# EAGLE board Micro_Bit_Breakout (EAGLE 7.3.0)
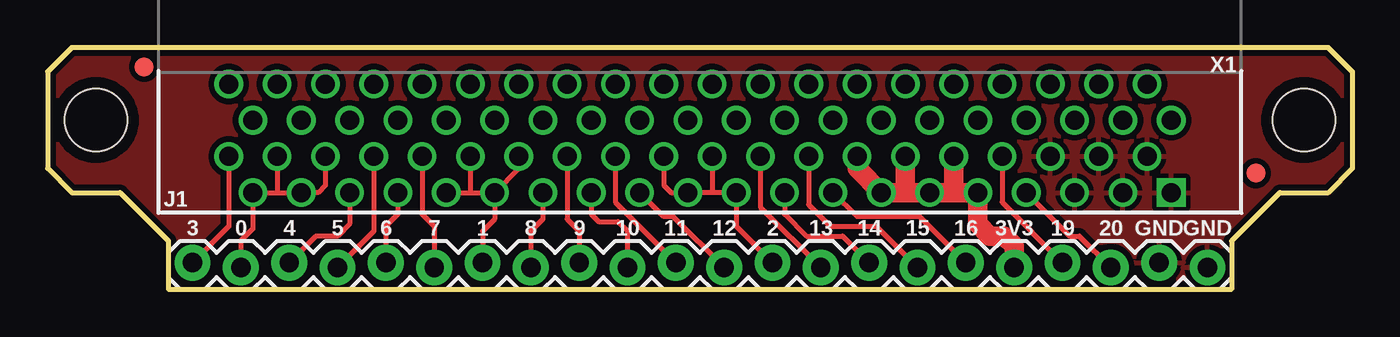
[diagram p0: board, top side]
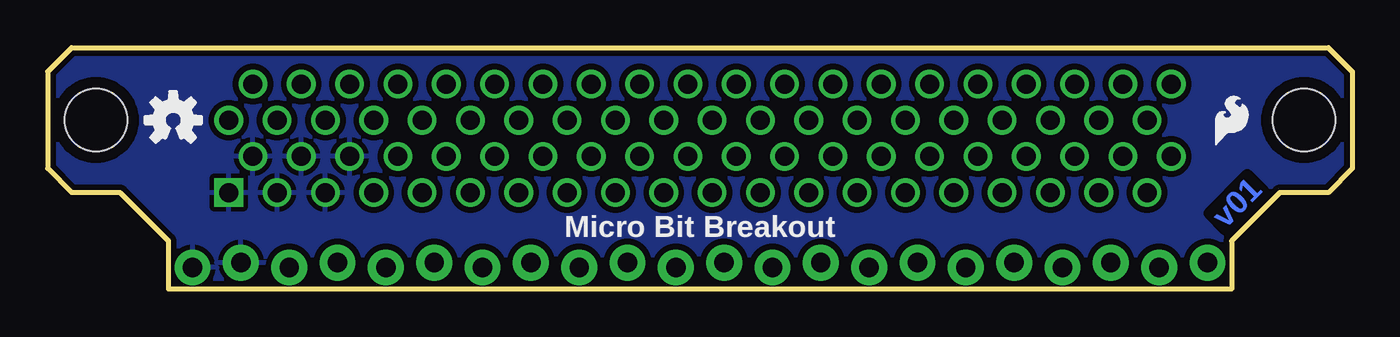
[diagram p1: board, bottom side, seen from below]

Size 68.58 x 12.7 mm. Coordinates in mm from the lower left corner, seen from the top.
Outline: 6.35,0 62.23,0 62.23,2.54 64.77,5.08 67.31,5.08 68.58,6.35 68.58,11.43 67.31,12.7 1.27,12.7 0,11.43 0,6.35 1.27,5.08 3.81,5.08 6.35,2.54 6.35,0
Copper layers (1*16): Top 0.035mm / dielectric 1.5mm / Bottom 0.035mm
Design rules "SparkFun-2-layer-STANDARD": minimum track width 10mil, minimum drill 20mil, track to track 10mil, track to pad 8mil, pad to pad 8mil, via to via 10mil, smd to smd 8mil, copper to edge 8mil, drill to drill 8mil, minimum pad ring 10mil, minimum via ring 10mil, stop-mask expansion 4mil, vias tented up to drill 25mil, thermal gap 10mil

## Footprints (pad centres in the part's own frame; a part is rotated, then mirrored left to right if it is on the bottom)
FIDUCIAL-1X2 = smd 1 x 1: 1 0,0
STAND-OFF = hole 3.302: 0,0
1X22_LOCK = drill 1.016 pad 1.88: 1 0,0.127; 2 2.54,-0.127; 3 5.08,0.127; 4 7.62,-0.127; 5 10.16,0.127; 6 12.7,-0.127; 7 15.24,0.127; 8 17.78,-0.127; 9 20.32,0.127; 10 22.86,-0.127; 11 25.4,0.127; 12 27.94,-0.127; 13 30.48,0.127; 14 33.02,-0.127; 15 35.56,0.127; 16 38.1,-0.127; 17 40.64,0.127; 18 43.18,-0.127; 19 45.72,0.127; 20 48.26,-0.127; 21 50.8,0.127; 22 53.34,-0.127
VEC-127-080-R = drill 1 square: A1 -24.765,0 | drill 1: A2 -23.495,-1.9; A3 -22.225,0; A4 -20.955,-1.9; A5 -19.685,0; A6 -18.415,-1.9; A7 -17.145,0; A8 -15.875,-1.9; A9 -14.605,0; A10 -13.335,-1.9; A11 -12.065,0; A12 -10.795,-1.9; A13 -9.525,0; A14 -8.255,-1.9; A15 -6.985,0; A16 -5.715,-1.9; A17 -4.445,0; A18 -3.175,-1.9; A19 -1.905,0; A20 -0.635,-1.9; A21 0.635,0; A22 1.905,-1.9; A23 3.175,0; A24 4.445,-1.9; A25 5.715,0; A26 6.985,-1.9; A27 8.255,0; A28 9.525,-1.9; A29 10.795,0; A30 12.065,-1.9; A31 13.335,0; A32 14.605,-1.9; A33 15.875,0; A34 17.145,-1.9; A35 18.415,0; A36 19.685,-1.9; A37 20.955,0; A38 22.225,-1.9; A39 23.495,0; A40 24.765,-1.9; B1 -24.765,-3.8; B2 -23.495,-5.7; B3 -22.225,-3.8; B4 -20.955,-5.7; B5 -19.685,-3.8; B6 -18.415,-5.7; B7 -17.145,-3.8; B8 -15.875,-5.7; B9 -14.605,-3.8; B10 -13.335,-5.7; B11 -12.065,-3.8; B12 -10.795,-5.7; B13 -9.525,-3.8; B14 -8.255,-5.7; B15 -6.985,-3.8; B16 -5.715,-5.7; B17 -4.445,-3.8; B18 -3.175,-5.7; B19 -1.905,-3.8; B20 -0.635,-5.7; B21 0.635,-3.8; B22 1.905,-5.7; B23 3.175,-3.8; B24 4.445,-5.7; B25 5.715,-3.8; B26 6.985,-5.7; B27 8.255,-3.8; B28 9.525,-5.7; B29 10.795,-3.8; B30 12.065,-5.7; B31 13.335,-3.8; B32 14.605,-5.7; B33 15.875,-3.8; B34 17.145,-5.7; B35 18.415,-3.8; B36 19.685,-5.7; B37 20.955,-3.8; B38 22.225,-5.7; B39 23.495,-3.8; B40 24.765,-5.7

## Placement (x,y rotation side)
FD1  FIDUCIAL1X2  [FIDUCIAL-1X2]  5.08,11.68 0 top
FD2  FIDUCIAL1X2  [FIDUCIAL-1X2]  63.5,6.1 0 top
FRAME1  FRAME-LETTER  [CREATIVE_COMMONS]  10.16,-11.43 0 top  (outside the outline)
H1  STAND-OFF  [STAND-OFF]  2.54,8.89 0 top
H2  STAND-OFF  [STAND-OFF]  66.04,8.89 0 top
J1  M22LOCK  [1X22_LOCK]  60.96,1.27 180 top
LOGO1  SFE_LOGO_FLAME.1_INCH  [SFE_LOGO_FLAME_.1]  7.49,7.24 0 bottom
LOGO3  OSHW-LOGOS  [OSHW-LOGO-S]  61.98,8.89 0 bottom
X1  EDGE-80PTH-RA  [VEC-127-080-R]  34.29,5.08 180 top

## Library data of the parts
FD1 FD2 FRAME1 LOGO1 LOGO3 = SparkFun-Aesthetics
H1 H2 = SparkFun-Electromechanical
J1 X1 = SparkFun-Connectors

## Nets
GND: J1.1 J1.2 X1.A1 X1.A2 X1.A3 X1.A4 X1.A5 X1.A6
N$2: J1.6 X1.A15
N$3: J1.3 X1.A7
N$4: J1.4 X1.A8
N$5: J1.5 X1.A9 X1.A10 X1.A11 X1.A12 X1.A13 X1.A14
N$6: J1.7 X1.A16
N$7: J1.8 X1.A17
N$8: J1.9 X1.A18
N$9: J1.10 X1.A19 X1.A20 X1.A21 X1.A22
N$10: J1.11 X1.A23
N$11: J1.12 X1.A24
N$12: J1.13 X1.A25
N$13: J1.14 X1.A26
N$14: J1.15 X1.A27
N$15: J1.16 X1.A28 X1.A29 X1.A30 X1.A31
N$17: J1.17 X1.A32
N$18: J1.18 X1.A33
N$19: J1.19 X1.A34
N$20: J1.20 X1.A35
N$21: J1.21 X1.A36 X1.A37 X1.A38 X1.A39
N$22: J1.22 X1.A40

## Tracks (layer width: path | path; a pad name or v marks a point on that pad's centre or on a via)
GND
  pour Top (isolate 0.305): 0,11.43 0,6.35 1.27,5.08 3.81,5.08 6.35,2.54 6.35,0 62.23,0 62.23,2.54 64.77,5.08 67.31,5.08 68.58,6.35 68.58,11.43 67.31,12.7 1.27,12.7
  pour Bottom (isolate 0.305): 1.27,12.7 0,11.43 0,6.35 1.27,5.08 3.81,5.08 6.35,2.54 6.35,0 62.23,0 62.23,2.54 64.77,5.08 67.31,5.08 68.58,6.35 68.58,11.43 67.31,12.7
N$2
  Top 0.254: J1.6 45.85,3.81 42.55,3.81 X1.A15
N$3
  Top 0.254: X1.A7 53.72,2.79 54.23,2.79 J1.3
N$4
  Top 0.254: X1.A8 50.16,4.57 J1.4
N$5
  Top 0.762: 47.62,5.21 47.5,5.08 | 45.09,5.21 45.21,5.08
  Top 1.016: X1.A10 47.62,5.21 | X1.A12 45.09,5.21 | X1.A14 42.55,6.35 X1.A13 45.21,5.08 X1.A11 47.5,5.08 X1.A9 48.9,3.43 49.53,2.79 50.29,2.79 50.8,2.29 J1.5
N$6
  Top 0.254: J1.7 43.56,3.3 41.15,3.3 40.01,4.45 X1.A16
N$7
  Top 0.254: J1.8 41.78,2.79 39.88,2.79 38.73,3.94 X1.A17
N$8
  Top 0.254: X1.A18 37.47,4.32 J1.9
N$9
  Top 0.254: J1.10 36.2,3.3 X1.A19 34.92,5.08 | 34.92,5.08 X1.A21 32.77,5.08 32.38,5.46 X1.A22 | X1.A20 34.92,5.08
N$10
  Top 0.254: J1.11 32.89,3.81 32.38,3.81 X1.A23
N$11
  Top 0.254: X1.A24 29.84,4.57 J1.12
N$12
  Top 0.254: J1.13 30.48,3.05 29.97,3.56 28.96,3.56 28.57,3.94 X1.A25
N$13
  Top 0.254: X1.A26 27.3,3.68 27.94,3.05 J1.14
N$14
  Top 0.254: X1.A27 26.04,3.68 25.4,3.05 J1.15
N$15
  Top 0.254: X1.A29 23.5,3.68 22.86,3.05 J1.16 | X1.A31 22.23,5.08 | 22.23,5.08 X1.A29 | X1.A30 22.23,5.08 | X1.A28 24.77,6.35 X1.A29
N$17
  Top 0.254: X1.A32 19.68,3.94 20.32,3.3 J1.17
N$18
  Top 0.254: X1.A33 18.41,3.94 17.78,3.3 J1.18
N$19
  Top 0.254: X1.A34 17.14,3.05 J1.19
N$20
  Top 0.254: J1.20 14.1,2.79 15.24,2.79 15.88,3.43 X1.A35
N$21
  Top 0.254: J1.21 10.16,2.54 10.79,3.17 X1.A39 12.06,5.08 | 12.06,5.08 X1.A37 14.22,5.08 14.61,5.46 X1.A36 | X1.A38 12.06,5.08
N$22
  Top 0.254: X1.A40 9.53,3.3 J1.22

## Text on the board
Bottom: v01
tPlace: 3 | 0 | 4 | 5 | 6 | 7 | 1 | 8 | 9 | 10 | 11 | 12 | 2 | 13 | 14 | 15 | 16 | 3V3 | 19 | 20 | GND | GND
bPlace: Micro Bit Breakout
tDocu: Shawn Hymel